# EAGLE board OSB_GRF (EAGLE 9.5.1)
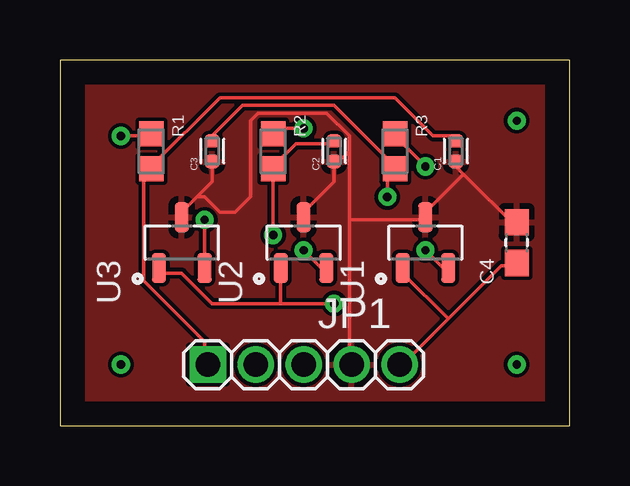
[diagram p0: board, top side]
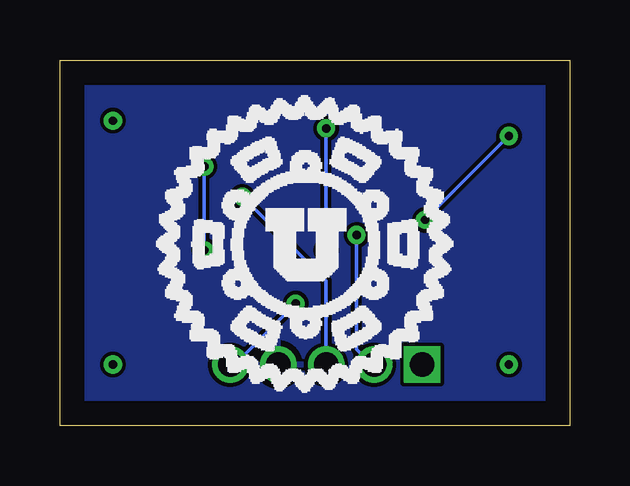
[diagram p1: board, bottom side, seen from below]

Size 21.26 x 15.23 mm. Coordinates in mm from the lower left corner, seen from the top.
Outline: 0,0 21.26,0 21.26,15.23 0,15.23 0,0
Copper layers (1*16): Top 0.035mm / dielectric 1.5mm / Bottom 0.035mm
Design rules "default": minimum track width 6mil, minimum drill 0.35mm, track to track 6mil, track to pad 6mil, pad to pad 6mil, via to via 6mil, smd to smd 6mil, copper to edge 40mil, drill to drill 6mil, minimum pad ring 10mil, minimum via ring 8mil, stop-mask expansion 4mil, vias tented up to drill 0mil, thermal gap 10mil

## Footprints (pad centres in the part's own frame; a part is rotated, then mirrored left to right if it is on the bottom)
CAPC1005X55N = smd 0.54 x 0.6: 1 -0.43,0; 2 0.43,0
CAPC1608X90 = smd 1.1 x 1: 1 -0.85,0; 2 0.85,0
1_05X2MM = drill 1.016 pad 1.3 square: 1 -4,0 | drill 1.016 pad 1.3: 2 -2,0; 3 0,0; 4 2,0; 5 4,0
RESC1607X60N = smd 1.04 x 1.02: 1 -0.735,0; 2 0.735,0
SOT95P237X112-3N = smd 1.24 x 0.59: 1 -1.055,0.95; 2 -1.055,-0.95; 3 1.055,0

## Placement (x,y rotation side)
C1  CC0402JRX7R7BB104  [CAPC1005X55N]  16.51,11.43 90 top
C2  CC0402JRX7R7BB104  [CAPC1005X55N]  11.43,11.43 90 top
C3  CC0402JRX7R7BB104  [CAPC1005X55N]  6.35,11.43 90 top
C4  CC0603KRX7R7BB152  [CAPC1608X90]  19.05,7.62 90 top
JP1  [1_05X2MM]  10.16,2.54 0 top
R1  RC0603JR-0710KL  [RESC1607X60N]  3.81,11.43 270 top
R2  RC0603JR-0710KL  [RESC1607X60N]  8.89,11.43 270 top
R3  RC0603JR-0710KL  [RESC1607X60N]  13.97,11.43 270 top
U1  DRV5053PAQDBZR  [SOT95P237X112-3N]  15.24,7.62 90 top
U2  DRV5053PAQDBZR  [SOT95P237X112-3N]  10.16,7.62 90 top
U3  DRV5053PAQDBZR  [SOT95P237X112-3N]  5.08,7.62 90 top

## Library data of the parts
C1-C3 = CC0402JRX7R7BB104; DESCRIPTION: Cap Ceramic 0.1uF 16V X7R 5% SMD 0402 125°C Paper T/R; DIGI-KEY_PART_NUMBER: 311-1676-1-ND; DIGI-KEY_PURCHASE_URL: https://www.digikey.com/product-detail/en/yageo/CC0402JRX7R7BB104/311-1676-1-ND/5195578?utm_source=snapeda&utm_medium=aggregator&utm_campaign=symbol; MF: Yageo; MP: CC0402JRX7R7BB104; PACKAGE: 0402 Yageo
C4 = CC0603KRX7R7BB152; DESCRIPTION: 0603 1.5 nF 16 V ±10 % Tolerance X7R SMT Multilayer Ceramic Capacitor; DIGI-KEY_PART_NUMBER: 311-4064-1-ND; DIGI-KEY_PURCHASE_URL: https://www.digikey.com/product-detail/en/yageo/CC0603KRX7R7BB152/311-4064-1-ND/8025153?utm_source=snapeda&utm_medium=aggregator&utm_campaign=symbol; MF: Yageo; MP: CC0603KRX7R7BB152; PACKAGE: 0603 Yageo
JP1 = pinhead
R1-R3 = RC0603JR-0710KL; DESCRIPTION: RC Series 0603 0.1 W 10 kOhms 5% ±100 ppm/°C SMT Thick Film Chip Resistor; DIGI-KEY_PART_NUMBER: 311-10KGRCT-ND; DIGI-KEY_PURCHASE_URL: https://www.digikey.com/product-detail/en/yageo/RC0603JR-0710KL/311-10KGRCT-ND/729647?utm_source=snapeda&utm_medium=aggregator&utm_campaign=symbol; MF: Yageo; MP: RC0603JR-0710KL; PACKAGE: 0603 Yageo
U1-U3 = DRV5053PAQDBZR; DESCRIPTION: 2.5 to 38 V Analog Bipolar Hall Effect Sensor 3-SOT-23 -40 to 125; DIGI-KEY_PART_NUMBER: 296-38458-1-ND; DIGI-KEY_PURCHASE_URL: https://www.digikey.com/product-detail/en/texas-instruments/DRV5053PAQDBZR/296-38458-1-ND/5022223?utm_source=snapeda&utm_medium=aggregator&utm_campaign=symbol; MF: Texas Instruments; MP: DRV5053PAQDBZR; PACKAGE: SOT-23-3 Texas Instruments

## Nets
+5V: C4.1 JP1.5 U1.1 U2.1 U3.1
GND: C1.1 C2.1 C3.1 C4.2 JP1.4 U1.3 U2.3 U3.3
N$1: R1.1 U3.2
N$2: R2.1 U2.2
N$3: R3.1 U1.2
N$4: C1.2 JP1.1 R1.2
N$5: C2.2 JP1.2 R2.2
N$6: C3.2 JP1.3 R3.2

## Tracks (layer width: path | path; a pad name or v marks a point on that pad's centre or on a via)
+5V  (via drill 0.35)
  Top 0.152: 9.21,5.08 6.35,5.08 5.08,6.35 4.13,6.35 U3.1 | 9.21,5.08 9.21,6.35 U2.1 | 16.19,4.45 14.29,2.54 JP1.5 | 16.19,4.45 18.41,6.67 19.05,6.67 C4.1 | 16.19,4.45 14.29,6.35 U1.1 | v11.43,5.08 9.21,5.08
  Bottom 0.152: v11.43,5.08 13.97,2.54 JP1.5
GND
  Top 0.152: 16.83,10.48 19.05,8.26 C4.2 | 16.83,10.48 16.51,10.79 C1.1 | 16.83,10.48 15.24,8.89 U1.3 15.24,8.57 12.06,8.57 | C3.1 6.35,10.16 5.71,9.53 | 5.71,9.53 5.08,8.89 U3.3 | 11.43,10.79 11.43,10.16 10.16,8.89 U2.3 | 5.71,9.53 6.03,9.53 6.67,8.89 7.3,8.89 7.94,9.53 7.94,12.7 8.26,13.02 11.11,13.02 12.06,12.06 12.06,11.43 | 11.43,10.79 12.06,11.43 | 11.43,10.79 C2.1 | 12.06,11.43 12.06,8.57 | 12.06,8.57 12.06,2.54 JP1.4
  pour Bottom: -1.27,17.78 22.86,17.78 22.86,-1.27 -1.27,-1.27
  pour Top: -1.27,16.51 22.86,16.51 22.86,-2.54 -1.27,-2.54
N$1  (via drill 0.35)
  Top 0.152: v2.54,12.06 3.81,12.06 R1.1 | v6.03,8.57 6.03,6.67 U3.2
  Bottom 0.152: v6.03,8.57 v2.54,12.06
N$2  (via drill 0.35)
  Top 0.152: v10.16,12.38 8.89,12.38 R2.1 | v10.16,7.3 11.11,6.35 U2.2
  Bottom 0.152: v10.16,7.3 v10.16,12.38
N$3  (via drill 0.35)
  Top 0.152: v15.24,10.79 13.97,12.06 R3.1 | v15.24,7.3 16.19,6.35 U1.2
  Bottom 0.152: v15.24,7.3 v15.24,10.79
N$4
  Top 0.152: C1.2 16.51,12.06 15.56,12.06 13.97,13.65 6.67,13.65 3.81,10.79 R1.2 3.81,10.48 3.49,10.16 3.49,6.03 6.03,3.49 6.03,2.54 JP1.1
N$5  (via drill 0.35)
  Top 0.152: C2.2 11.43,11.75 9.84,11.75 8.89,10.79 R2.2 v8.89,7.94
  Bottom 0.152: v8.89,7.94 8.89,3.17 8.26,2.54 JP1.2
N$6  (via drill 0.35)
  Top 0.152: 13.65,11.11 13.97,10.79 R3.2 13.65,11.11 | 13.65,11.11 11.43,13.34 7.62,13.34 6.35,12.06 C3.2 | 13.65,11.11 v13.65,9.53
  Bottom 0.152: JP1.3 10.16,6.03 v13.65,9.53
N$7  (via drill 0.35)
  other vias: 2.54,2.54
N$8  (via drill 0.35)
  other vias: 19.05,2.54
N$9  (via drill 0.35)
  other vias: 19.05,12.7

## Text on the board
tOrigins: C:/Users/UGRAD/Documents/GitHub/KneeProsthetic/PCB/OSB_Logo.bmp